# Altium PCB 24CH.PcbDoc (part 2 of 2)
Units mm, origin at the board's own origin, x right, y up, seen from the top; angles counter-clockwise.
Board outline 96.5 x 64.4 mm, 2 copper layers (F.Cu, B.Cu), stack 1.581 mm thick; 140 components, 144 nets, 455 pads, 160 vias.
Unrouted connection lines stored in the file: 94.
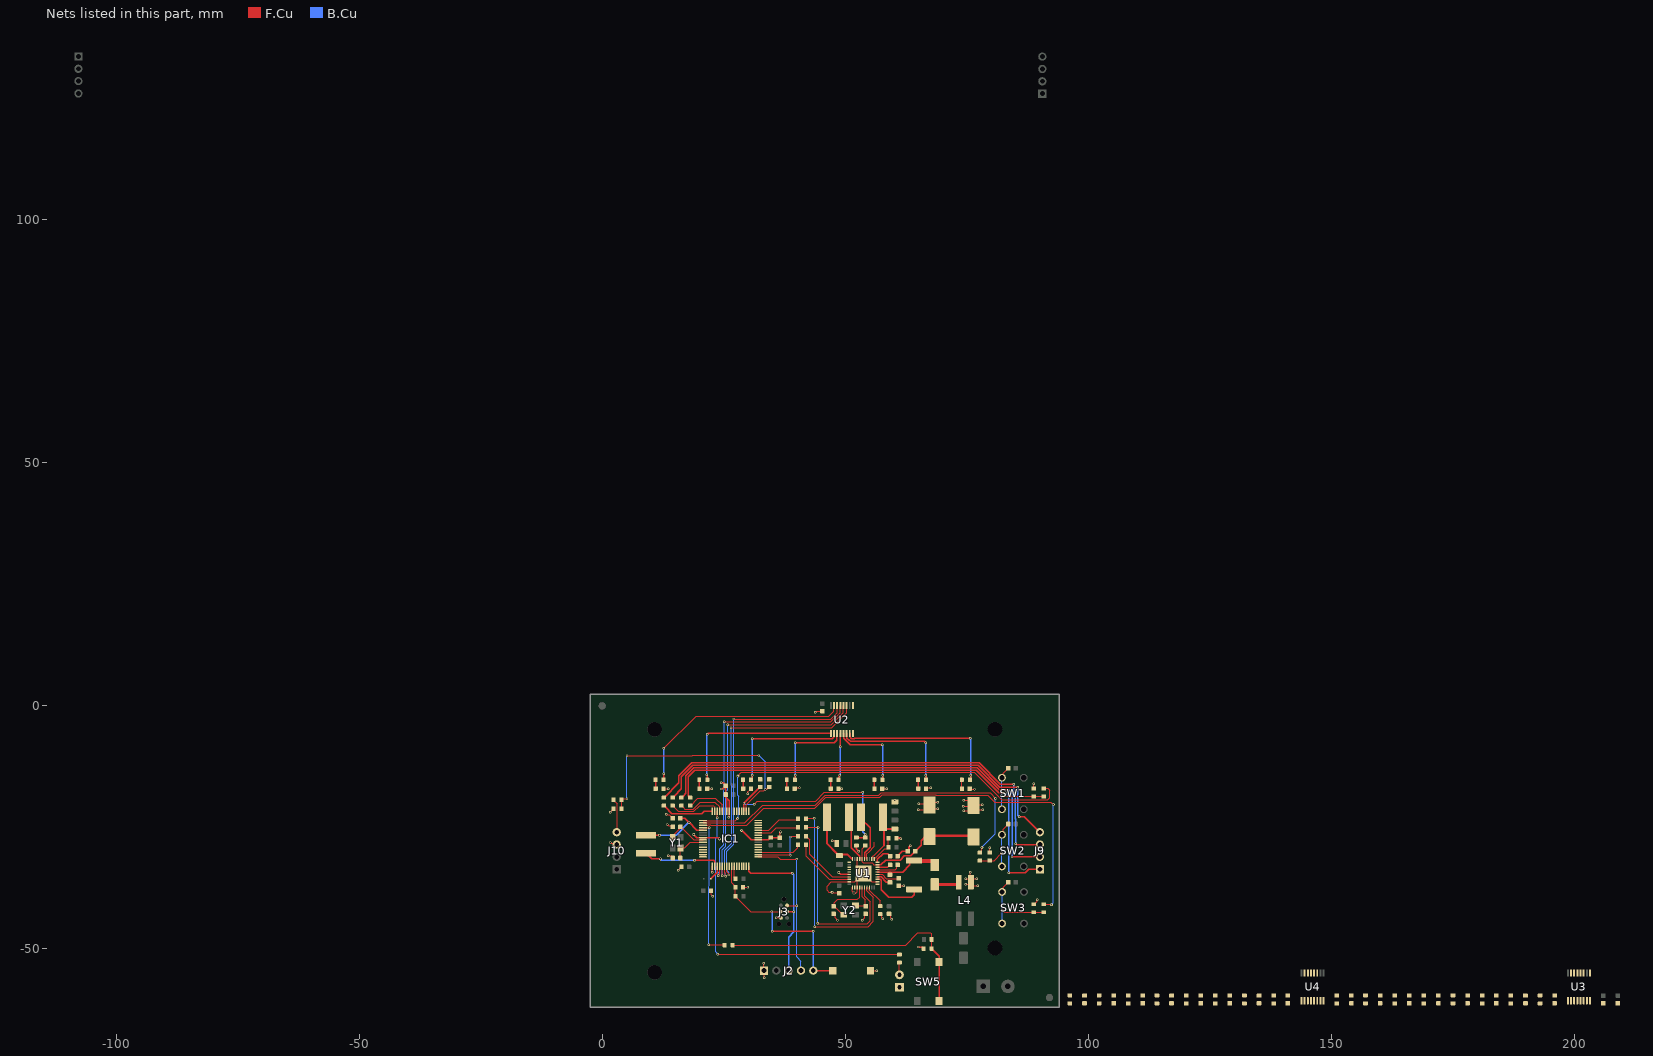
[diagram p2: the nets of this part, all layers, seen from the top]

## Via types
v1: diameter 0.5, hole 0.3, F.Cu to B.Cu, tented both sides, 135 vias
v2: diameter 0.6, hole 0.35, F.Cu to B.Cu, tented both sides, 25 vias

## Nets (pads, with @x,y where several pads share a name; then routed paths per layer and width w, separated by ;. In a path a pad name is that pad's centre, name@x,y a point inside that pad or via, vN(x,y) a via of type N, cw(c..) or ccw(c..) an arc to the next point about the centre after c; other vN are vias at no path point) (continued)
BTN_DOWN: IC1.3 R5.1 | length 97.9
  F.Cu w0.25: IC1.3@20.738,-24.577 20.763,-24.552 21.72,-24.552 21.79,-24.482 22.267,-24.482 22.312,-24.527 29.773,-24.527 33.2,-21.1 43.736,-21.1 46.036,-18.8 57.1,-18.8 57.575,-18.325 68.611,-18.325 68.636,-18.35 79.35,-18.35 80.8,-19.8 92.3,-19.8 v2(92.8,-20.3) ; R5.1@90.8,-40.8 90.85,-40.85 92.35,-40.85 v2(92.4,-40.9)
  B.Cu w0.25: v2(92.4,-40.9) 92.8,-40.5 v2(92.8,-20.3)
BTN_ENTER: IC1.2 R4.1 | length 75.8
  F.Cu w0.25: IC1.2@20.738,-24.077 20.763,-24.052 21.584,-24.052 21.604,-24.032 22.453,-24.032 22.498,-24.077 29.323,-24.077 33,-20.4 43.8,-20.4 45.85,-18.35 56.914,-18.35 57.389,-17.875 68.798,-17.875 68.823,-17.9 79.784,-17.9 v2(80.942,-19.058) ; R4.1@77.7,-30.175 77.758,-30.175 78.033,-29.9 78.033,-29.167 v2(78.1,-29.1)
  B.Cu w0.25: v2(78.1,-29.1) 80.9,-26.3 80.9,-19.1 v2(80.942,-19.058)
BTN_UP: IC1.1 R2.1 | length 86.3
  F.Cu w0.25: IC1.1@20.738,-23.577 22.614,-23.577 22.664,-23.627 27.353,-23.627 27.78,-23.2 v2(27.875,-23.2) ; v2(27.904,-14.444) 28.647,-13.7 76.5,-13.7 82.15,-19.35 91.65,-19.35 92.1,-18.9 92.1,-17.4 91.675,-16.975 R2.1@90.8,-16.975
  B.Cu w0.25: v2(27.875,-23.2) 27.942,-23.133 27.942,-22.558 28.1,-22.4 28.1,-18.567 27.904,-18.371 v2(27.904,-14.444)
CLK: IC1.32 J2.3 J3.4 | length 32.1
  F.Cu w0.3: IC1.32@30.163,-33.002 30.163,-34.063 30.557,-34.457 v1(39.1,-34.457) ; J3.4@38.028,-42.327 v1(39.393,-42.327)
  B.Cu w0.3: J2.3@38.348,-54.457 38.348,-47.552 39.393,-46.507 v1(39.393,-42.327) 39.393,-34.75 v1(39.1,-34.457)
DIO: IC1.33 J2.4 J3.2 | length 33.4
  F.Cu w0.254: IC1.33@32.088,-31.077 36.157,-31.077 36.58,-31.5 v1(40,-31.5) ; J3.2@38.028,-41.057 38.05,-41.078 39.978,-41.078 v1(40,-41.1)
  B.Cu w0.254: v1(40,-31.5) v1(40,-41.1) 40,-51.6 40.888,-52.488 J2.4@40.888,-54.457
EXTAL: C8.1 IC1.10 Y1.2 | length 7.1
  F.Cu w0.25: C8.1@16.083,-31.147 16.083,-29.227 Y1.2@16.108,-29.202 16.983,-29.202 18.108,-28.077 IC1.10@20.738,-28.077
GND: C1.1 C2.1 C3.1 C4.1 C5.1 C6.1 C7.1 C8.2 C9.2 C12.1 C13.1 C14.1 C15.1 C16.1 C17.1 C18.1 C19.2 C20.2 C21.1 C22.2 C23.1 C24.1 C28.2 C30.2 C31.2 C32.2 D1.1 D4.1 D5.1 D6.1 D7.1 D8.1 D9.1 D10.1 D11.1 D12.1 D13.1 D14.1 D15.1 D16.1 D17.1 D18.1 D19.1 D20.1 D21.1 D22.1 D23.1 D24.1 D25.1 D26.1 D27.1 IC1.8 IC1.17 IC1.40 IC1.57 IC1.58 J2.1 J3.5 J10.3 L4.3 R1.2 R3.1 R6.2 R7.2 R39.2 R40.1 R42.2 R44.2 SW4.2 U1.1 U1.2 U1.14 U1.18 U1.23 U1.24 U1.25 U1.26 U1.29 U1.31 U1.33 U1.41 U2.8 U3.8 U4.8 | length 118.2
  F.Cu w0.25: C20.2@47.6,-42.775 47.9,-43.075 47.9,-43.6 v1(48.4,-44.1) ; v1(53.5,-44.1) 54,-43.6 54,-42.975 C19.2@54.2,-42.775
  F.Cu w0.254: v1(1.692,-21.873) 2.359,-21.206 R44.2@2.359,-21.143 ; v1(1.7,-28.1) 1.767,-28.1 1.914,-28.247 2.722,-28.247 J10.3@2.998,-28.524 ; D1.1@12.588,-17.013 v1(13.587,-17.013) ; v1(13.2,-22.3) 13.247,-22.347 13.797,-22.347 14.525,-23.075 C1.1@14.525,-23.113 ; v1(13.4,-24.4) 13.467,-24.4 13.694,-24.627 14.24,-24.627 C9.2@14.513,-24.9 ; v1(13.6,-30.8) 13.647,-30.847 14.085,-30.847 14.19,-30.952 14.202,-30.952 14.538,-31.288 C8.2@14.538,-31.3 ; v1(15.62,-33.83) 16.312,-33.137 C3.1@16.312,-33.1 ; D4.1@21.575,-17.013 v1(22.575,-17.013) v1@22.587,-17 ; C4.1@22.4,-37.987 22.4,-38.856 22.7,-39.156 v1(22.7,-39.2) ; v1(22.603,-34.2) 22.64,-34.163 22.64,-33.012 IC1.17@22.663,-32.989 ; v1(26,-22.9) 26,-22.833 26.14,-22.693 26.14,-21.662 IC1.57@26.163,-21.639 ; C21.1@28.987,-37.3 v1(29.987,-37.3) v1@30,-37.287 ; v1(29.9,-18.1) 29.947,-18.053 29.947,-17.69 30.41,-17.227 30.41,-17.177 D5.1@30.575,-17.013 ; v1@33.187,-52.9 v1(33.2,-52.913) J2.1@33.2,-53.913 ; J2.1@33.3,-54.887 v1(33.3,-55.887) v1@33.313,-55.9 ; v1@35.758,-43.609 v1(35.771,-43.597) J3.5@36.771,-43.597 ; D6.1@39.588,-16.863 v1(40.587,-16.863) v1@40.6,-16.85 ; v1(43.8,-1.3) 43.9,-1.3 44.125,-1.075 C30.2@45.3,-1.075 ; v1(47.3,-27.7) 47.347,-27.747 47.877,-27.747 48.2,-28.07 C15.1@48.2,-28.313 ; D7.1@48.6,-17.125 48.713,-17.013 v1(49.285,-17.013) ; C17.1@48.747,-38.527 48.609,-38.388 47.374,-38.388 v2(47.312,-38.327) 47.307,-38.322 46.607,-38.322 46.257,-37.972 46.257,-37.072 47.147,-36.182 U1.29@50.821,-36.182 51.967,-36.182 U1.41@52.467,-35.682 ; U1.31@51.467,-37.327 51.467,-38.109 51.8,-38.442 v2(51.8,-38.5) ; v2@51.8,-38.572 52.157,-38.572 52.467,-38.262 U1.33@52.467,-37.327 U1.41@52.467,-35.682 ; U1.18@52.467,-31.536 52.467,-33.182 v2(52.682,-33.397) v2(53.717,-34.432) ; v2(54.467,-33.272) 54.467,-33.682 v2(53.717,-34.432) ; U1.14@54.467,-31.536 54.467,-30.433 54.9,-30 56,-28.9 56,-28.1 ; SW4.2@55.487,-54.5 v1(56.487,-54.5) v1@56.5,-54.487 ; U1.2@56.613,-36.182 55.467,-36.182 v2(54.807,-35.522) v2(53.717,-34.432) ; R40.1@57.197,-42.834 57.259,-42.834 57.545,-43.12 57.545,-43.578 57.7,-43.733 v1(57.7,-43.8) ; D8.1@57.575,-17.013 v1(58.575,-17.013) v1@58.587,-17 ; C18.1@59,-42.762 59.012,-42.762 59.348,-43.098 59.348,-43.581 59.6,-43.833 v1(59.6,-43.9) ; C16.1@60.2,-19.763 v1(60.2,-19.375) ; C12.1@60.987,-37 v1(61.987,-37) v1@62,-36.987 ; v1@65,-21.362 v1(65.013,-21.35) 66.013,-21.35 ; v1@65.1,-20.162 v1(65.113,-20.15) C22.2@66.113,-20.15 ; D9.1@66.588,-16.863 v1(67.587,-16.863) v1@67.6,-16.85 ; C22.2@67.987,-21.15 v1(68.987,-21.15) v1@69,-21.137 ; C22.2@67.987,-19.85 v1(68.987,-19.85) v1@69,-19.837 ; v1@74.3,-20.613 v1(74.313,-20.6) C28.2@75.313,-20.6 ; v1@74.4,-21.612 v1(74.413,-21.6) C28.2@75.413,-21.6 ; v1@74.4,-19.413 v1(74.413,-19.4) C28.2@75.413,-19.4 ; v1@74.8,-36.712 v1(74.813,-36.7) L4.3@75.813,-36.7 ; v1@74.8,-35.613 v1(74.813,-35.6) L4.3@75.813,-35.6 ; D10.1@75.588,-17.113 v1(76.587,-17.113) v1@76.6,-17.1 ; v1@75.687,-34.2 v1(75.7,-34.213) L4.3@75.7,-35.213 ; L4.3@76.087,-35.6 v1(77.087,-35.6) v1@77.1,-35.587 ; L4.3@76.287,-37 v1(77.287,-37) v1@77.3,-36.987 ; C28.2@77.187,-20.3 v1(78.187,-20.3) v1@78.2,-20.287 ; C28.2@77.271,-21.351 v1(78.271,-21.351) v1@78.284,-21.338 ; v1@79.687,-29.2 v1(79.7,-29.213) R6.2@79.7,-30.212 ; v1@88.787,-16 v1(88.8,-16.013) R1.2@88.8,-17.013 ; R7.2@88.8,-40.813 88.862,-40.813 89.453,-40.222 89.453,-39.947 v1(89.5,-39.9) ; U1.41@52.467,-35.682 v2(52.542,-35.607) v2(53.717,-34.432)
  F.Cu w0.3: v2(18.828,-26.457) 19.448,-27.077 IC1.8@20.738,-27.077 23.848,-27.077 v2(24.128,-27.357) ; v1(24.473,-17.1) 24.511,-17.062 24.788,-17.062 25.425,-16.425 C7.1@25.425,-16.4 ; v1(24.473,-15.854) 24.489,-15.838 24.888,-15.838 25.425,-16.375 C7.1@25.425,-16.4 ; IC1.58@25.663,-21.652 25.663,-19.042 ; IC1.57@26.163,-21.652 26.163,-19.542 25.663,-19.042 ; v2(28.678,-25.607) 30.648,-27.577 IC1.40@32.088,-27.577 34.173,-27.577 C5.1@34.668,-27.082 36.478,-27.082 C2.1@36.508,-27.112 36.508,-26.077 v2(36.678,-25.907) ; v2(48.657,-34.272) 49.067,-34.682 U1.26@50.821,-34.682 ; R42.2@52.3,-28.725 52.3,-29.4 v1(52.8,-29.9) ; v1(65,-49.6) 65.778,-49.6 65.797,-49.618 65.872,-49.618 66.122,-49.868 R3.1@66.122,-49.943 ; C7.1@25.425,-16.4 25.434,-16.409 25.434,-18.228 C6.1@25.443,-18.237 25.443,-18.822 25.663,-19.042
  F.Cu w0.4: R39.2@60.525,-27.2 61.3,-27.2 v1(61.4,-27.3) ; C14.1@60.775,-30.9 60.775,-30.875 61.75,-29.9 C13.1@62.825,-29.9 63.075,-29.65 63.075,-29.125 v1(63.4,-28.8)
Led_Shift_O\E\: IC1.20 U2.13 | length 60.2
  F.Cu w0.25: v1(23.9,-34.9) 23.9,-34.832 24.163,-34.569 IC1.20@24.163,-33.002 ; v1(25.1,-3.3) 47.064,-3.3 48.975,-1.389 U2.13@48.975,0.062
  B.Cu w0.25: v1(23.9,-34.9) 23.9,-34.29 24.2,-33.99 24.2,-29.337 24.971,-28.566 24.971,-17.415 25.1,-17.286 v1(25.1,-3.3)
Led_ShiftReg_Latch: IC1.21 U2.12 | length 59.7
  F.Cu w0.25: 49.427,-1.573 49.625,-1.375 U2.12@49.625,0.062
  F.Cu w0.254: IC1.21@24.663,-33.002 24.682,-33.02 24.682,-34.882 v1(24.7,-34.9) ; v1(25.8,-3.9) 47.103,-3.9 49.427,-1.576 49.427,-1.573
  B.Cu w0.254: v1(24.7,-34.9) 24.7,-29.545 25.423,-28.822 25.423,-17.602 25.8,-17.225 v1(25.8,-3.9)
Led_ShiftRegCLK: IC1.22 U2.11 | length 60
  F.Cu w0.25: IC1.22@25.163,-33.002 25.163,-34.3 25.339,-34.475 25.339,-34.989 v1(25.386,-35.037) ; v1(26.5,-4.5) 47.2,-4.5 50.3,-1.4 50.3,0.037 U2.11@50.275,0.062
  B.Cu w0.25: v1(25.386,-35.037) 25.339,-34.989 25.339,-34.475 25.163,-34.3 25.163,-29.737 26.65,-28.25 26.65,-16.484 26.5,-16.334 v1(26.5,-4.5)
Led_ShiftRegDATA: IC1.23 U2.14 | length 58
  F.Cu w0.25: IC1.23@25.663,-33.002 25.663,-34.152 25.991,-34.48 25.991,-34.737 v1(26.039,-34.785) ; v1(27.1,-2.7) 47,-2.7 48.325,-1.375 U2.14@48.325,0.062
  B.Cu w0.25: v1(26.039,-34.785) 25.991,-34.737 25.991,-34.178 25.613,-33.8 25.613,-29.923 27.1,-28.436 v1(27.1,-2.7)
NetC1_2: C1.2 IC1.5 L1.1 | length 15.7
  F.Cu w0.3: L1.1@9.008,-26.617 11.768,-26.617 v2(11.778,-26.607) ; C1.2@16.075,-23.1 17,-23.1 v2(17.85,-23.95) ; v2@17.78,-23.88 19.477,-25.577 IC1.5@20.738,-25.577
  B.Cu w0.3: v2(11.778,-26.607) 15.193,-26.607 v2(17.85,-23.95)
NetC10_1: C10.1 U1.4 | length 3.1
  F.Cu w0.3: U1.4@56.613,-35.182 57.382,-35.182 58.451,-36.251 59.151,-36.251 C10.1@59.2,-36.3
NetC10_2: C10.2 D3.1 R34.1 U1.6 | length 14.1
  F.Cu w0.3: U1.6@56.613,-34.182 61.784,-34.182 63.27,-32.696 63.27,-32.272 63.733,-31.809 R34.1@64.157,-31.809
  F.Cu w0.4: 59.199,-34.207 59.2,-34.208 C10.2@59.2,-34.725
  F.Cu w0.8: R34.1@64.157,-31.809 64.219,-31.872 68.057,-31.872 68.643,-32.457 D3.1@68.657,-32.472
NetC11_1: C11.1 U1.8 | length 2.8
  F.Cu w0.3: U1.8@56.613,-33.182 58.718,-33.182 58.875,-33.025 58.925,-33.025 59.2,-32.75 C11.1@59.2,-32.7
NetC11_2: C11.2 U1.7 | length 5.4
  F.Cu w0.25: U1.7@56.613,-33.682 60.318,-33.682 60.596,-33.404 60.596,-32.879 C11.2@60.775,-32.7 ; C11.2@60.775,-32.675 61.1,-32.35 C11.2@61.125,-32.35
NetC12_2: C12.2 U1.5 | length 4.7
  F.Cu w0.25: U1.5@56.613,-34.682 57.582,-34.682 58.425,-35.525 C12.2@60.975,-35.525
NetC14_2: C14.2 U1.10 | length 3.9
  F.Cu w0.3: U1.10@56.613,-32.182 56.613,-31.562 57.775,-30.4 58.725,-30.4 58.9,-30.575 58.925,-30.575 59.225,-30.875 C14.2@59.225,-30.9
NetC25_1: C25.1 R3.2 R99.1 SW5.1 | length 57.5
  F.Cu w0.25: R99.1@26.825,-49.2 62.4,-49.2 64.953,-46.647 67.6,-46.647 67.747,-46.793 C25.1@67.747,-48.043 67.772,-48.068 R3.2@67.772,-49.943 ; R3.2@68.097,-50.268 68.693,-50.865
  F.Cu w0.3: R3.2@67.772,-49.943 67.772,-50.018 68.022,-50.268 68.097,-50.268 68.693,-50.865 69.29,-51.462 SW5.1@69.29,-52.7 SW5.1@69.29,-60.7
NetC26_2: C26.2 R1.1 R2.2 SW1.3 SW1.4 | length 17.7
  F.Cu w0.254: v1(82.2,-18.5) 82.325,-18.625 R1.1@88.8,-18.625 R2.2@90.8,-18.625 ; SW1.4@82.218,-14.767 82.476,-14.509 82.476,-13.874 83.525,-12.825 C26.2@83.525,-12.8
  B.Cu w0.254: SW1.3@82.218,-21.267 82.209,-21.258 82.209,-18.509 v1(82.2,-18.5) 82.209,-18.491 82.209,-14.776 SW1.4@82.218,-14.767
NetC27_2: C27.2 R4.2 R6.1 SW2.3 SW2.4 | length 14.4
  F.Cu w0.254: R4.2@77.7,-31.825 R6.1@79.7,-31.825 80.625,-31.825 v1(82.209,-30.241) ; SW2.4@82.218,-26.517 82.476,-26.259 82.476,-25.374 83.525,-24.325 C27.2@83.525,-24.3
  B.Cu w0.254: SW2.3@82.218,-32.999 82.218,-30.25 v1(82.209,-30.241) 82.218,-30.232 SW2.4@82.218,-26.517
NetC29_2: C29.2 R5.2 R7.1 SW3.3 SW3.4 | length 17.7
  F.Cu w0.254: v1(82.259,-41.991) 82.718,-42.45 R7.1@88.8,-42.45 R5.2@90.8,-42.45 ; SW3.4@82.268,-38.267 82.526,-38.009 82.526,-37.324 83.525,-36.325 C29.2@83.525,-36.3
  B.Cu w0.254: SW3.3@82.268,-44.749 82.268,-42 v1(82.259,-41.991) 82.268,-41.982 SW3.4@82.268,-38.267
NetD1_2: D1.2 R8.2 | length 2.2
  F.Cu w0.3: R8.2@10.975,-14.9 R8.2@10.994,-14.919 ; R8.2@10.994,-14.819 10.994,-16.994 D1.2@11.013,-17.013
NetD3_2: D3.2 L4.4 | length 5.2
  F.Cu w0.6: D3.2@68.4,-36.7 73.05,-36.7 73.35,-36.4 L4.4@73.35,-36.25
NetD4_2: D4.2 R9.2 | length 2.2
  F.Cu w0.3: R9.2@19.975,-14.8 19.994,-14.819 19.994,-16.994 D4.2@20.013,-17.013
NetD5_2: D5.2 R10.2 | length 2.2
  F.Cu w0.3: R10.2@28.975,-14.8 28.994,-14.819 28.994,-16.994 D5.2@29.013,-17.013
NetD6_2: D6.2 R11.2 | length 2.2
  F.Cu w0.3: R11.2@37.975,-14.8 37.994,-14.819 37.994,-16.994 D6.2@38.013,-17.013
NetD7_2: D7.2 R12.2 | length 2.2
  F.Cu w0.3: R12.2@46.975,-14.8 46.994,-14.819 46.994,-16.994 D7.2@47.013,-17.013
NetD8_2: D8.2 R13.2 | length 2.2
  F.Cu w0.3: R13.2@55.975,-14.8 55.994,-14.819 55.994,-16.994 D8.2@56.013,-17.013
NetD9_2: D9.2 R14.2 | length 2.2
  F.Cu w0.3: 64.975,-14.7 64.994,-14.719 R14.2@64.994,-15.2 ; R14.2@64.994,-15.3 64.994,-16.994 D9.2@65.013,-17.013
NetD10_2: D10.2 R15.2 | length 2.2
  F.Cu w0.254: R15.2@73.975,-14.8 73.994,-14.819 73.994,-16.994 D10.2@74.013,-17.013
NetD11_2: D11.2 R26.2 | length 2.6
  F.Cu w0.25: D11.2@61.15,-55.4 R26.2@61.15,-52.795
NetD12_2: D12.2 R16.2
NetD13_2: D13.2 R17.2
NetD14_2: D14.2 R18.2
NetD15_2: D15.2 R19.2
NetD16_2: D16.2 R20.2
NetD17_2: D17.2 R21.2
NetD18_2: D18.2 R22.2
NetD19_2: D19.2 R23.2
NetD20_2: D20.2 R24.2
NetD21_2: D21.2 R25.2
NetD22_2: D22.2 R27.2
NetD23_2: D23.2 R28.2
NetD24_2: D24.2 R29.2
NetD25_2: D25.2 R30.2
NetD26_2: D26.2 R31.2
NetD27_2: D27.2 R37.2
NetJ9_1: J9.1 R91.2 | length 95.7
  F.Cu w0.3: R91.2@18.1,-18.875 18.025,-18.875 17.775,-18.625 17.775,-18.55 17.7,-18.475 17.7,-14.607 19.082,-13.225 76.929,-13.225 81.604,-17.9 v1(83,-17.9) ; v1(83.6,-34.3) 87.062,-34.3 87.758,-33.604 J9.1@90.036,-33.604
  B.Cu w0.3: v1(83,-17.9) 83,-17.902 83.6,-18.502 v1(83.6,-34.3)
NetJ9_2: J9.2 R92.2 | length 93.6
  F.Cu w0.3: R92.2@16.3,-18.875 16.375,-18.875 16.625,-18.625 16.625,-18.55 17.2,-17.975 17.2,-14.4 18.875,-12.725 77.136,-12.725 81.711,-17.3 v1(83.5,-17.3) ; v1(84.3,-31) 84.364,-31.064 J9.2@90.036,-31.064
  B.Cu w0.3: v1(83.5,-17.3) 84.3,-18.1 v1(84.3,-31)
NetJ9_3: J9.3 R93.2 | length 95.1
  F.Cu w0.3: R93.2@12.7,-18.875 12.775,-18.875 15.8,-15.85 15.8,-14.386 18.461,-11.725 77.55,-11.725 81.925,-16.1 v1(84.7,-16.1) ; v1(85.1,-28.4) 85.224,-28.524 J9.3@90.036,-28.524
  B.Cu w0.3: v1(84.7,-16.1) 84.7,-17.793 85,-18.093 85,-23.169 85.1,-23.269 v1(85.1,-28.4)
NetJ9_4: J9.4 R94.2 | length 88.9
  F.Cu w0.3: R94.2@14.5,-18.875 14.575,-18.875 14.825,-18.625 14.825,-18.55 16.3,-17.075 16.3,-14.593 18.668,-12.225 77.343,-12.225 81.818,-16.7 v1(85.5,-16.7) ; v1(85.8,-22.8) 86.852,-22.8 J9.4@90.036,-25.984
  B.Cu w0.3: v1(85.5,-16.7) 85.5,-22.5 v1(85.8,-22.8)
NetJP1_2: IC1.19 JP1.2 | length 3.1
  F.Cu w0.3: JP1.2@22.353,-35.557 22.648,-35.262 22.648,-35.237 23.663,-34.222 IC1.19@23.663,-33.002
NetL1_2: IC1.18 L1.2 | length 15.9
  F.Cu w0.3: L1.2@9.008,-30.317 10.148,-31.457 v2(11.978,-31.457) ; v2(19.028,-31.757) 22.978,-31.757 23.163,-31.942 IC1.18@23.163,-33.002
  B.Cu w0.3: v2(11.978,-31.457) 12.278,-31.757 v2(19.028,-31.757)
NetL2_1: L2.1 U1.17 | length 9.5
  F.Cu w0.3: L2.1@50.75,-23 51.2,-23.45 51.2,-29.2 52.967,-30.967 U1.17@52.967,-31.536
NetL2_2: L2.2 R35.1 U1.20 | length 12.1
  F.Cu w0.4: L2.2@46.25,-23 46.25,-28.325 48.3,-30.375 48.3,-30.475 48.414,-30.589 48.602,-30.589 R35.1@48.8,-30.787 ; R35.1@48.646,-30.545 50.425,-30.545 51.315,-31.434 ; 51.315,-31.434 U1.20@51.417,-31.536
NetL3_1: L3.1 U1.15 | length 9.6
  F.Cu w0.3: L3.1@53.2,-23.2 55.1,-25.1 55.1,-29.11 53.967,-30.243 U1.15@53.967,-31.536
NetL3_2: L3.2 R36.1 U1.12 | length 12.3
  F.Cu w0.25: U1.12@55.467,-31.536 55.469,-31.534 55.469,-31.157 55.513,-31.113 55.513,-30.997 55.705,-30.805 55.895,-30.805 57.99,-28.71
  F.Cu w0.4: L3.2@57.75,-22.9 57.75,-24.662 L3.2@57.99,-24.902 ; 57.99,-28.71 L3.2@57.99,-24.902 ; R36.1@60.2,-25.312 58.4,-25.312 L3.2@57.99,-24.902
NetR8_1: R8.1 U2.15 | length 45.8
  F.Cu w0.254: v1(12.7,-8.7) 19.3,-2.1 46.6,-2.1 47.6,-1.1 47.6,-0.013 U2.15@47.675,0.062
  F.Cu w0.3: R8.1@12.625,-15.2 12.7,-15.125 v1(12.7,-14)
  B.Cu w0.3: v1(12.7,-14) v1(12.7,-8.7)
NetR9_1: R9.1 U2.1 | length 35
  F.Cu w0.3: v1(21.5,-14.2) 21.625,-14.325 R9.1@21.625,-15.2 ; v1(21.6,-5.8) 21.654,-5.8 21.792,-5.663 U2.1@47.025,-5.663
  B.Cu w0.3: v1(21.5,-14.2) 21.5,-5.954 21.6,-5.854 v1(21.6,-5.8)
NetR10_1: R10.1 U2.2 | length 26.2
  F.Cu w0.3: R10.1@30.625,-15.2 30.875,-14.95 30.875,-14.325 v1(30.9,-14.3) ; v1(30.9,-6.8) 47.291,-6.8 47.625,-6.466 47.625,-5.713 U2.2@47.675,-5.663
  B.Cu w0.3: v1(30.9,-14.3) v1(30.9,-6.8)
NetR11_1: R11.1 U2.3 | length 17.8
  F.Cu w0.3: R11.1@39.625,-15.2 39.662,-15.162 39.662,-14.337 v1(39.7,-14.3) ; v1(39.7,-7.6) 47.7,-7.6 48.275,-7.025 48.275,-5.713 U2.3@48.325,-5.663
  B.Cu w0.3: v1(39.7,-14.3) v1(39.7,-7.6)
NetR12_1: R12.1 U2.4 | length 9.3
  F.Cu w0.3: R12.1@48.625,-14.8 48.625,-14.629 48.9,-14.354 v1(48.9,-14.3) ; v1(48.975,-8.375) U2.4@48.975,-5.663
  B.Cu w0.3: v1(48.9,-14.3) 48.9,-14.246 48.975,-14.171 v1(48.975,-8.375)
NetR13_1: R13.1 U2.5 | length 16.8
  F.Cu w0.3: U2.5@49.625,-5.663 49.675,-5.713 49.675,-6.688 50.987,-8 v1(57.6,-8) ; R13.1@57.625,-15.2 57.662,-15.163 57.662,-14.337 v1(57.7,-14.3)
  B.Cu w0.3: v1(57.6,-8) 57.6,-8.054 57.7,-8.154 v1(57.7,-14.3)
NetR14_1: R14.1 U2.6 | length 24.9
  F.Cu w0.3: U2.6@50.275,-5.663 50.325,-5.713 50.325,-6.631 50.794,-7.1 50.902,-7.1 51.052,-7.25 66.25,-7.25 v1(66.6,-7.6) ; v1(66.6,-14.3) 66.625,-14.325 R14.1@66.625,-14.8
  B.Cu w0.3: v1(66.6,-14.3) v1(66.6,-7.6)
NetR15_1: R15.1 U2.7 | length 34.3
  F.Cu w0.3: U2.7@50.925,-5.663 50.975,-5.713 50.975,-6.466 51.259,-6.75 51.891,-6.75 51.941,-6.7 v1(75.7,-6.7) ; R15.1@75.625,-15.2 75.762,-15.063 75.762,-14.338 v1(75.8,-14.3)
  B.Cu w0.3: v1(75.7,-6.7) 75.7,-6.754 75.8,-6.854 v1(75.8,-14.3)
NetR16_1: R16.1 U3.15
NetR17_1: R17.1 U3.1
NetR18_1: R18.1 U3.2
NetR19_1: R19.1 U3.3
NetR20_1: R20.1 U3.4
NetR21_1: R21.1 U3.5
NetR22_1: R22.1 U3.6
NetR23_1: R23.1 U3.7
NetR24_1: R24.1 U4.15
NetR25_1: R25.1 U4.1
NetR27_1: R27.1 U4.2
NetR28_1: R28.1 U4.3
NetR29_1: R29.1 U4.4
NetR30_1: R30.1 U4.5
NetR31_1: R31.1 U4.6
NetR34_2: R34.2 U1.3 | length 11.7
  F.Cu w0.3: U1.3@56.613,-35.682 56.966,-35.682 56.989,-35.705 57.164,-35.705 57.369,-35.91 57.369,-37.769 58.972,-39.372 63.657,-39.372 64.157,-38.872 R34.2@64.157,-37.514
NetR37_1: R37.1 U4.7
NetR38_2: R38.2 R39.1 U1.11 | length 6
  F.Cu w0.25: U1.11@55.967,-31.536 55.967,-31.257 55.969,-31.255 56.248,-31.255 58.153,-29.35 58.625,-29.35 R38.2@58.875,-29.1 R39.1@58.875,-27.2
NetR40_2: R40.2 U1.38 | length 4.8
  F.Cu w0.25: U1.38@54.967,-37.327 54.967,-37.882 57.197,-40.112 R40.2@57.197,-41.197
NetU2_9: U2.9 U3.14
NetU3_9: U3.9 U4.14
P000: IC1.64 R93.1 | length 10.9
  F.Cu w0.3: R93.1@12.7,-20.525 12.775,-20.525 13.025,-20.775 13.025,-20.85 14.35,-22.175 20.479,-22.175 21.002,-21.652 IC1.64@22.663,-21.652
P001: IC1.63 R94.1 | length 10.7
  F.Cu w0.25: R94.1@14.5,-20.525 14.575,-20.525 14.85,-20.8 14.85,-20.875 15.675,-21.7 18.873,-21.7 20.073,-20.5 22.874,-20.5 23.138,-20.764 23.138,-21.627 IC1.63@23.163,-21.652
P003: IC1.61 R92.1 | length 10.1
  F.Cu w0.25: R92.1@16.3,-20.525 16.375,-20.525 16.65,-20.8 16.65,-20.875 17.025,-21.25 18.686,-21.25 20.136,-19.8 23.2,-19.8 24.138,-20.738 24.138,-21.627 IC1.61@24.163,-21.652
P004: IC1.60 R91.1 | length 9
  F.Cu w0.25: R91.1@18.1,-20.525 18.175,-20.525 19.7,-19 23.3,-19 24.663,-20.363 IC1.60@24.663,-21.652
P012: IC1.55
P013: IC1.54
P014: IC1.53
P015: IC1.52
P100: IC1.48
P101: IC1.47
P102: IC1.46
P103: IC1.45
P104: IC1.44 R96.2 | length 9
  F.Cu w0.25: IC1.44@32.088,-25.577 34.308,-25.577 36.428,-23.457 R96.2@40.228,-23.457
P105: IC1.43 R95.2 | length 8.6
  F.Cu w0.25: IC1.43@32.088,-26.077 34.808,-26.077 35.828,-25.057 R95.2@40.228,-25.057
P106: IC1.42
P107: IC1.41
P109: IC1.34 R97.2 | length 12.3
  F.Cu w0.25: IC1.34@32.088,-30.577 38.548,-30.577 v1(38.728,-30.757) ; v1(38.775,-26.97) 38.945,-26.8 R97.2@40.275,-26.8
  B.Cu w0.25: v1(38.728,-30.757) 38.728,-26.857 v1@38.828,-26.857
P110: IC1.35 R98.2 | length 9.3
  F.Cu w0.25: IC1.35@32.088,-30.077 39.308,-30.077 40.228,-29.157 R98.2@40.228,-28.357
P111: IC1.36
P112: IC1.37
P113: IC1.38
P200: IC1.27
P201/MD: IC1.26 R33.1 | length 2.7
  F.Cu w0.25: IC1.26@27.163,-33.002 27.163,-35.317 R33.1@27.403,-35.557
P204: IC1.24
P301: IC1.31
P302: IC1.30
P303: IC1.29
P304: IC1.28
P407: IC1.16
P408: IC1.15
P409: IC1.14
P411: IC1.12
P413: IC1.13
P500: IC1.49
Relay_ADC: C24.2 IC1.50 R43.2 R44.1 | length 54.1
  F.Cu w0.254: R44.1@3.997,-21.143 3.987,-21.133 3.987,-19.343 R43.2@3.977,-19.333 4.162,-19.147 5.053,-19.147 v1(5.1,-19.1) ; v1(5.1,-10.3) 18.576,-10.3 18.676,-10.2 v1(32.2,-10.2) ; IC1.50@29.663,-21.652 29.663,-20.35 32.561,-17.452 33.045,-17.452 33.049,-17.448 33.185,-17.448 33.433,-17.2 33.567,-17.2 33.769,-16.998 34.077,-16.998 C24.2@34.4,-16.675
  B.Cu w0.254: v1(5.1,-19.1) v1(5.1,-10.3) ; v1(32.2,-10.2) 33.5,-11.5 v1(33.5,-17.2)
RELAY_CAP_ADC: J10.4 R43.1 | length 7
  F.Cu w0.254: R43.1@2.327,-19.333 2.327,-19.408 3.074,-20.155 3.074,-25.896 J10.4@2.986,-25.984
RES: C21.2 IC1.25 J2.5 J3.3 R32.1 SW4.1 | length 41.8
  F.Cu w0.254: IC1.25@26.663,-33.002 26.663,-36.367 27.453,-37.157 27.393,-37.217 27.393,-38.817 R32.1@27.393,-39.157 30.537,-42.3 v1(34.9,-42.3) ; v1@34.9,-42.327 J3.3@36.758,-42.327
  F.Cu w0.3: v1(35,-46.4) v1(43.4,-46.4) ; J2.5@43.428,-54.457 47.357,-54.457 SW4.1@47.4,-54.5
  B.Cu w0.3: v1(34.9,-42.3) 34.9,-42.354 35,-42.454 v1(35,-46.4) ; v1(43.4,-46.4) 43.428,-46.428 J2.5@43.428,-54.457
RESETb: R96.1 U1.37 | length 43.7
  F.Cu w0.25: R96.1@41.925,-23.2 42.012,-23.113 v2(43.625,-23.113) ; v1(43.7,-45.4) 54.7,-45.4 55.8,-44.3 55.8,-39.401 54.467,-38.068 U1.37@54.467,-37.327
  B.Cu w0.25: v1(43.7,-45.4) 43.7,-39.372 43.7,-23.496
SAVEb: R95.1 U1.36 | length 40.5
  F.Cu w0.25: R95.1@41.925,-25 41.952,-24.973 v2(44.417,-24.973) ; v1@44.37,-44.8 54.5,-44.8 55.1,-44.2 55.1,-40.264 53.967,-39.131 U1.36@53.967,-37.327
  B.Cu w0.25: v1(44.37,-44.755) v2@44.37,-25.03
SDI/RXD: R97.1 U1.27 | length 14.2
  F.Cu w0.25: R97.1@41.925,-26.8 41.925,-26.875 42.2,-27.15 42.275,-27.15 42.65,-27.525 42.65,-30.532 47.3,-35.182 U1.27@50.821,-35.182
SDO/TXD: R98.1 U1.28 | length 13.2
  F.Cu w0.25: R98.1@41.925,-28.6 41.925,-30.925 46.682,-35.682 U1.28@50.821,-35.682
ShiftReg_Latch: U3.12 U4.12
ShiftReg_{\O\E\}\: U3.13 U4.13
ShiftRegCLK: U3.11 U4.11
"uC CLK": U1.32
User_BTN: IC1.4 R99.2 | length 28.6
  F.Cu w0.25: IC1.4@20.738,-25.077 22.008,-25.077 v1(22.028,-25.057) ; v1(21.9,-49.1) R99.2@25.075,-49.1
  B.Cu w0.25: v1(21.9,-49.1) 21.9,-37.167 22.028,-37.038 v1(22.028,-25.057)
User_LED: IC1.62 R26.1 | length 67.2
  F.Cu w0.254: IC1.62@23.663,-21.652 23.682,-21.67 23.682,-23.034 v1(23.7,-23.052) ; v1(23.8,-51.1) 23.822,-51.122 61.128,-51.122 R26.1@61.15,-51.145
  B.Cu w0.254: v1(23.7,-23.052) 23.7,-26.899 23.323,-27.276 23.323,-50.623 v1(23.8,-51.1)
VFILT: C13.2 C22.1 C28.1 R41.1 U1.9 U1.16 | length 29.3
  F.Cu w0.254: R41.1@54.1,-28.725 54.025,-28.725 53.752,-28.998 53.752,-29.073 53.467,-29.358 U1.16@53.467,-31.536 53.467,-32.032 53.751,-32.316 55.516,-32.316 55.882,-32.682 U1.9@56.613,-32.682
  F.Cu w0.3: U1.9@56.613,-32.682 57.337,-32.682 58.294,-31.725 61.304,-31.725 62.183,-30.847 63.453,-30.847 64.375,-29.925 C13.2@64.375,-29.9 64.375,-29.875 65.6,-28.65 65.6,-27.75 C22.1@66.7,-26.65
  F.Cu w0.5: C22.1@66.6,-26.8 C22.1@66.65,-26.85 ; C22.1@66.75,-26.7 75.75,-26.7 C28.1@75.8,-26.75
VFILT_ADC: C23.2 IC1.51 R41.2 R42.1 | length 43.8
  F.Cu w0.254: v1(31.3,-20.2) 31.9,-19.6 43.9,-19.6 45.685,-17.815 53.56,-17.815 v1(53.6,-17.775)
  F.Cu w0.3: IC1.51@29.163,-21.652 v1(29.163,-19.987) 32.475,-16.675 C23.2@32.5,-16.675 ; R42.1@52.5,-27.075 53.95,-27.075 54.1,-27.225 R41.2@54.504,-27.225 ; R41.2@54.1,-27.075 v1(54.1,-26.42)
  B.Cu w0.254: v1(29.163,-19.987) 29.23,-19.987 29.444,-20.2 v1(31.3,-20.2)
  B.Cu w0.3: v1(53.6,-17.775) 53.6,-25.92 v1(54.1,-26.42) 54.1,-26.742
XCLKC: U1.21
XTAL: C9.1 IC1.9 Y1.1 | length 8.2
  F.Cu w0.25: Y1.1@14.508,-26.937 14.508,-26.712 16.163,-25.057 16.328,-25.057 18.848,-27.577 IC1.9@20.738,-27.577
XTAL1: C19.1 U1.35 Y2.1 | length 6.2
  F.Cu w0.25: Y2.1@52.107,-41.072 53.912,-41.072 54.087,-41.247 54.087,-39.887 53.467,-39.267 U1.35@53.467,-37.327
XTAL2: C20.1 U1.34 Y2.3 | length 11.1
  F.Cu w0.25: Y2.3@49.707,-42.972 49.472,-42.972 47.747,-41.247 47.747,-40.52 48.467,-39.8 52.5,-39.8 52.967,-39.333 U1.34@52.967,-37.327
pads on no net: H1.Un1 H2.Un1 H3.Un1 H4.Un1 IC1.6 IC1.7 J3.6 J3.Un1 J3.Un2 J3.Un3 J9_1.1 J9_1.2 J9_1.3 J9_1.4 J10_1.1 J10_1.2 J10_1.3 J10_1.4 U1.22 U1.39 U3.16 U4.9 Y1.3 Y1.4 Y2.2 Y2.4

## Keep-outs
Keep-Out Layer:
  the board outline again, w0.254

## Other copper
F.Cu:
  text "BY" at -2.1,-61.6 h3
B.Cu:
  text "BY" at 1.4,-61.6 h3

## Silkscreen, mask and mechanical layers (free items; w line width, h text height)
F.SilkS:
  text "KNX_MCU_8CH_V1.2" at 78.7,0.5 h3
  text "26.07.2026" at 88.4,-1.1 h2
  text "DIO" at 40.5,-41.2 h0.7
  text "3V3" at 34.2,-41.3 h0.7
  text "RES" at 34,-42.5 h0.7
  text "CLK" at 40.5,-42.5 h0.7
  text "GND" at 34.1,-43.8 h0.7
  text "GND" at 33.5,-52.1 h0.7 r90
  text "DIO" at 41.1,-52.1 h0.7 r90
  text "RES" at 43.64,-52.1 h0.7 r90
  text "3V3" at 35.9,-52.2 h0.7 r90
  text "CLK" at 38.5,-52.2 h0.7 r90
Edge.Cuts:
  circle w0.254: c-105.24,104.786 r1.75
  circle w0.254: c75.26,104.786 r1.75
  circle w0.254: c-94.74,154.786 r1.75
  circle w0.254: c85.76,154.786 r1.75
  circle w0.254: c80.8,-49.8 r1.5
  circle w0.254: c10.8,-54.8 r1.5
  circle w0.254: c10.8,-4.8 r1.5
  circle w0.254: c80.8,-4.8 r1.5
  lines w0.254: -112.49,87.286 -112.49,172.286 93.01,172.286 93.01,87.286 -112.49,87.286 ; -112.222,16.393 93.278,16.393 93.278,80.793 -112.222,80.793 -112.222,16.393 ; -2.45,-62 -2.45,2.4 94.05,2.4 94.05,-62 -2.45,-62
Mechanical 3:
  lines w0.254: -2.45,-72.05 94.05,-72.05 94.05,12.45 -2.45,12.45 -2.45,-72.05

## Text inside footprints (layer, text, board x,y; h text height)
J3: Cmts.User "KEEPOUT" at 37.507,-42.747 h0.4 r90
U1: F.Fab "*" at 56.328,-36.814 h1 r180; F.Fab "*" at 56.328,-36.814 h1 r180; F.SilkS "*" at 57.776,-36.814 h1 r180; F.SilkS "*" at 57.776,-36.814 h1 r180